# EAGLE board PCB_ACKERMANN_150824 (EAGLE 9.6.2)
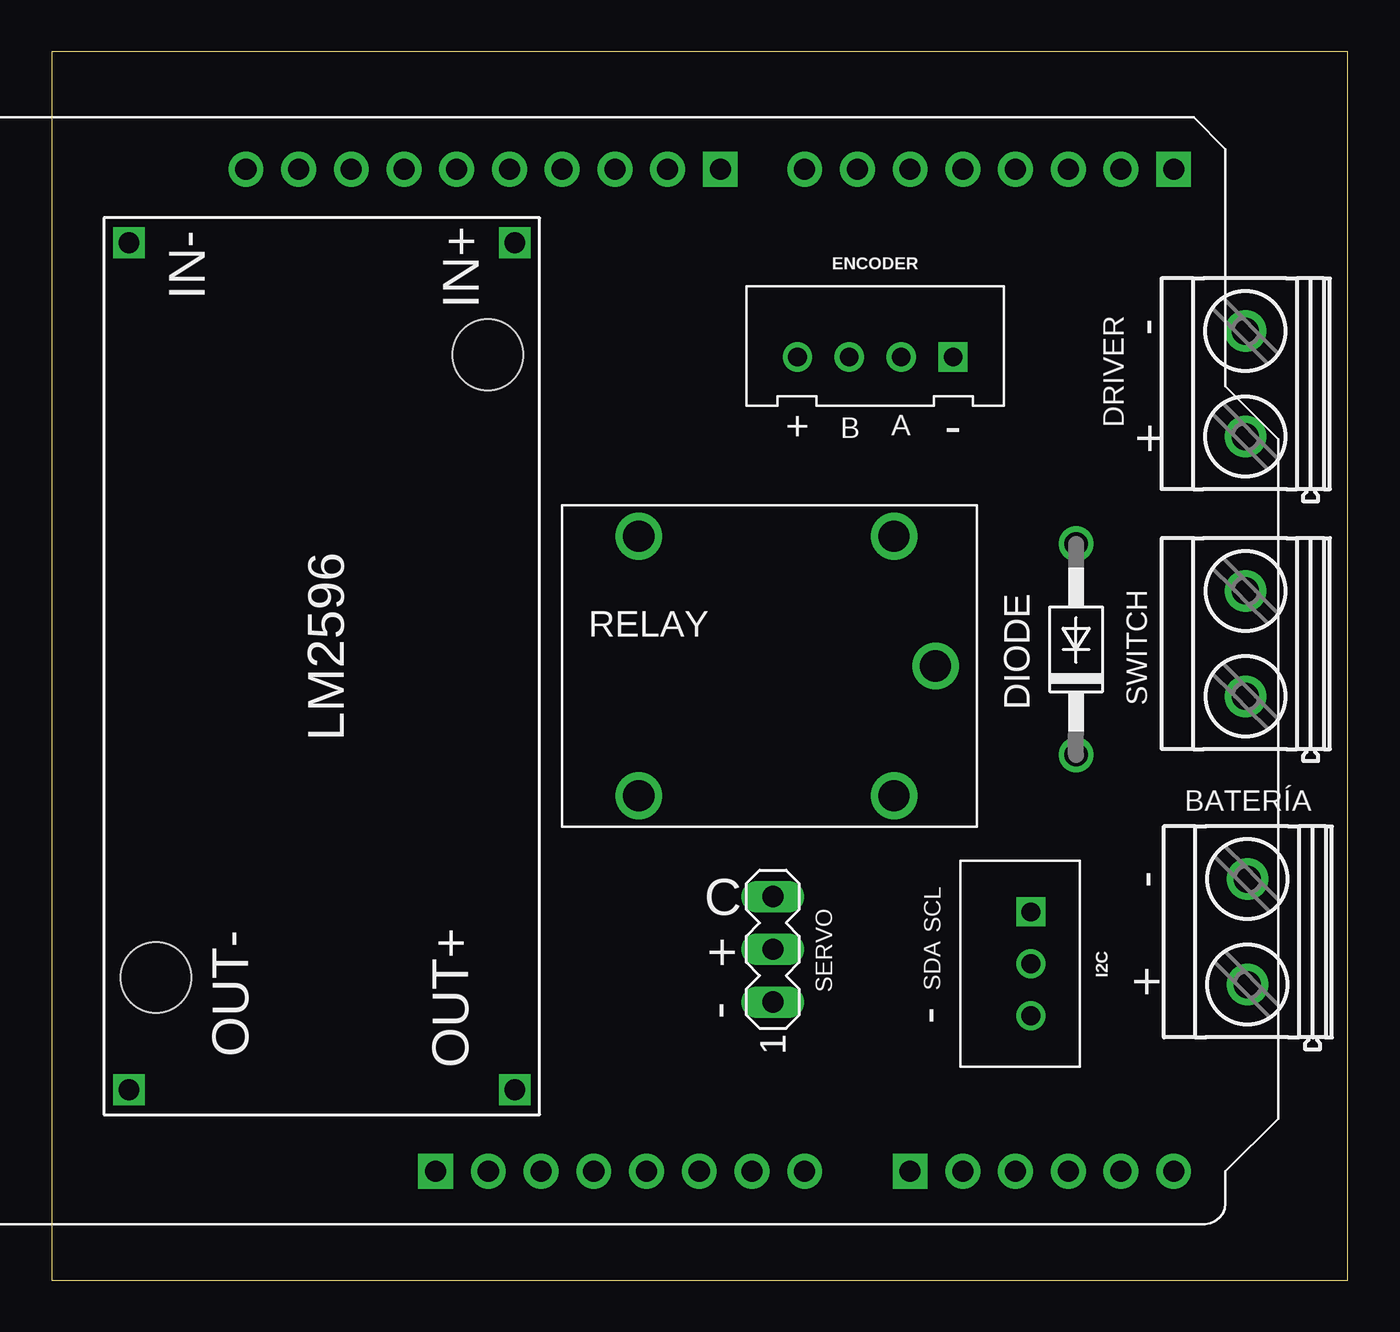
[diagram p0: board, top side]
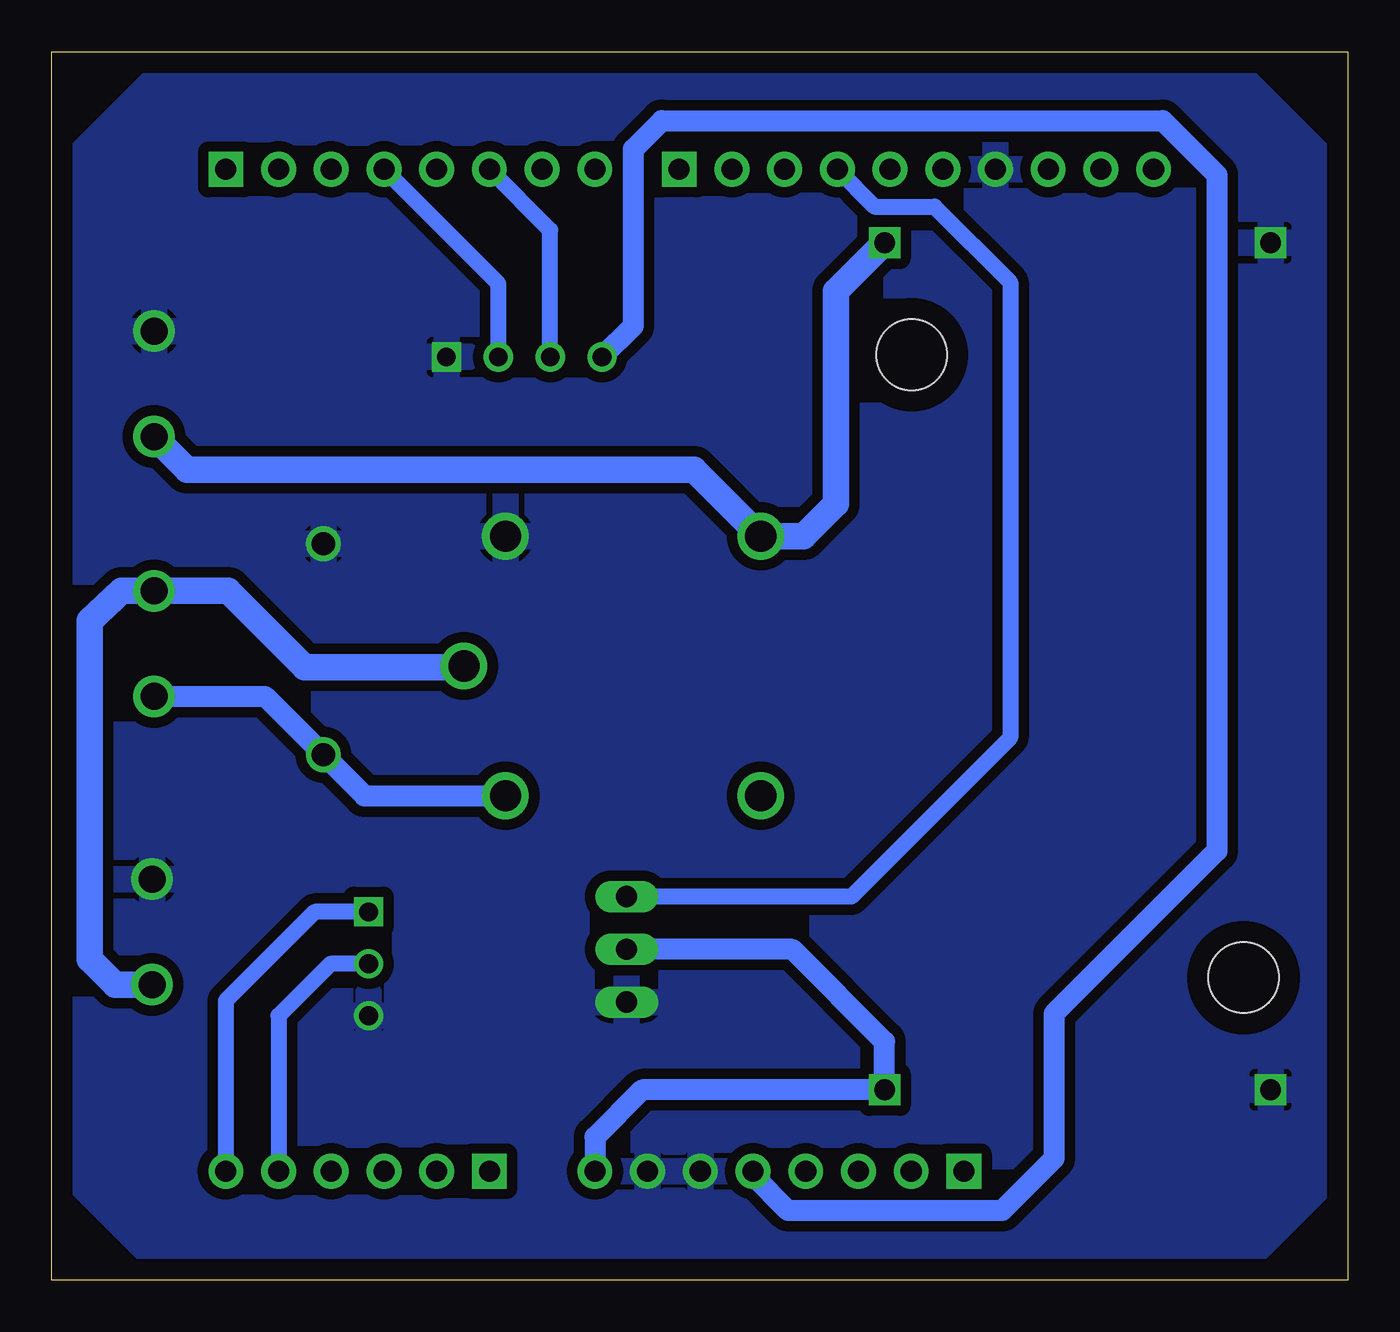
[diagram p1: board, bottom side, seen from below]

Size 62.43 x 59.16 mm. Coordinates in mm from the lower left corner, seen from the top.
Outline: 0,0 62.43,0 62.43,59.16 0,59.16 0,0
Copper layers (1*16): Top 0.035mm / dielectric 1.5mm / Bottom 0.035mm
Design rules "default *": minimum track width 6mil, minimum drill 0.35mm, track to track 20mil, track to pad 20mil, pad to pad 20mil, via to via 20mil, smd to smd 20mil, copper to edge 40mil, drill to drill 6mil, minimum pad ring 10mil, minimum via ring 8mil, stop-mask expansion 4mil, vias tented up to drill 0mil, thermal gap 10mil

## Footprints (pad centres in the part's own frame; a part is rotated, then mirrored left to right if it is on the bottom)
ARDUINO_A000066 = drill 1.016 pad 1.676: 3V3 35.56,2.54; 5V 38.1,2.54; A1 53.34,2.54; A2 55.88,2.54; A3 58.42,2.54; A4 60.96,2.54; A4(SDA) 21.336,50.8; A5 63.5,2.54; A5(SCL) 18.796,50.8; AREF 23.876,50.8; D1 60.96,50.8; D2 58.42,50.8; D3 55.88,50.8; D4 53.34,50.8; D5 50.8,50.8; D6 48.26,50.8; D7 45.72,50.8; D9 39.116,50.8; D10 36.576,50.8; D11 34.036,50.8; D12 31.496,50.8; D13 28.956,50.8; GND_1 43.18,2.54; GND_2 40.64,2.54; GND_3 26.416,50.8; IOREF 30.48,2.54; RST 33.02,2.54; VIN 45.72,2.54 | drill 1.016 pad 1.676 square: A0 50.8,2.54; D0 63.5,50.8; D8 41.656,50.8; P1 27.94,2.54
DO41-10 = drill 1.118: A 5.08,0; C -5.08,0
B4B-XH-A = drill 0.9 square: 1 3.75,0 | drill 0.9: 2 1.25,0; 3 -1.25,0; 4 -3.75,0
B3B-XH-A = drill 0.9 square: 1 2.5,0 | drill 0.9: 2 0,0; 3 -2.5,0
RELAY12V = drill 1.5: 1 16,-14; 2 16,-1.5; C 18,-7.75; NC 3.7,-14; NO 3.7,-1.5
MA03-1 = drill 1.016 long: 1 -2.54,0; 2 0,0; 3 2.54,0
LM2596 = drill 1 square: IN+ 1.2,-1.2; IN- 1.2,-19.8; OUT+ 42,-1.2; OUT- 42,-19.8 | hole 3.4: 6.6,-2.5; 36.6,-18.5
MKDSN1,5/2-5,08 = drill 1.3 pad 2: 1 -2.561,0.025; 2 2.519,0.025

## Placement (x,y rotation side)
A1  A000066  [ARDUINO_A000066]  -9.45,2.7 0 top
DIODE  1N4004  [DO41-10]  49.35,30.38 90 top
ENCODER  JST-XH-4  [B4B-XH-A]  39.67,44.46 0 top
I2C  JST-XH-3  [B3B-XH-A]  47.17,15.24 90 top
RELAY  [RELAY12V]  24.58,37.33 0 top
SV1  [MA03-1]  34.74,15.93 90 top
U$1  LM2596  [LM2596]  23.51,51.17 270 top
X1  MKDSN1,5/2-5,08  [MKDSN1,5/2-5,08]  57.63,16.8 90 top
X2  MKDSN1,5/2-5,08  [MKDSN1,5/2-5,08]  57.53,30.68 90 top
X3  MKDSN1,5/2-5,08  [MKDSN1,5/2-5,08]  57.53,43.19 90 top

## Library data of the parts
A1 = Arduino UNO; AVAILABILITY: Not in stock; MF: Arduino; MP: ARDUINO UNO R3 DIL; PACKAGE: Non-Standard Arduino; PRICE: None
DIODE = diode
ENCODER = con-JST-XH; MF: JST; MPN: B4B-XH-A
I2C = con-JST-XH; MF: JST; MPN: B3B-XH-A
RELAY = ModularRobot
SV1 = con-lstb; OC_FARNELL: unknown; OC_NEWARK: unknown
U$1 = LM2596
X1-X3 = con-phoenix-508

## Nets
3V3: A1.3V3
5V: A1.5V ENCODER.4
CONTROL: A1.D11 SV1.3
FASEA: A1.D3 ENCODER.2
FASEB: A1.D5 ENCODER.3
GND: A1.GND_1 A1.GND_2 A1.GND_3 DIODE.A ENCODER.1 I2C.3 RELAY.2 SV1.1 U$1.IN- U$1.OUT- X1.2 X3.2
SCL: A1.A5 I2C.1
SDA: A1.A4 I2C.2
VIN: RELAY.C X1.1 X2.2
VIN2: RELAY.NO U$1.IN+ X3.1
VINREG: A1.VIN SV1.2 U$1.OUT+
VSWITCH: DIODE.C RELAY.1 X2.1

## Tracks (layer width: path | path; a pad name or v marks a point on that pad's centre or on a via)
5V
  Bottom 1.016: ENCODER.4 34.42,45.97 34.42,54.47 33.04,55.85 8.91,55.85 6.29,53.23 6.29,20.68 14.15,12.82 14.15,5.85 16.66,3.34 26.96,3.34 28.65,5.04 A1.5V
CONTROL
  Bottom 0.762: A1.D11 22.79,51.7 19.9,51.7 16.26,48.06 16.26,26.13 23.91,18.47 SV1.3
FASEA
  Bottom 0.762: ENCODER.2 40.92,47.99 A1.D3
FASEB
  Bottom 0.762: ENCODER.3 38.42,50.57 A1.D5
GND
  pour Bottom: -0.31,52.56 6.19,59.05 56.26,59.05 64.2,51.12 64.2,7.75 55.95,-0.49 6.3,-0.49 -0.38,6.19 -0.38,52.49 -0.29,52.58
SCL
  Bottom 0.762: I2C.1 49.76,17.74 54.05,13.45 A1.A5
SDA
  Bottom 0.762: I2C.2 49.01,15.24 51.51,12.73 A1.A4
VIN
  Bottom 1.27: X1.1 59.38,14.24 60.61,15.46 60.61,31.75 59.07,33.2 X2.2 53.94,33.2 50.25,29.51 42.64,29.51 RELAY.C
VIN2
  Bottom 1.27: X3.1 55.91,39.04 31.49,39.04 RELAY.NO 26.21,35.83 24.64,37.39 24.64,47.63 U$1.IN+
VINREG
  Bottom 1.016: SV1.2 26.76,15.93 22.31,11.48 U$1.OUT+ 33.99,9.17 36.27,6.88 A1.VIN
VSWITCH
  Bottom 1.016: X2.1 52.16,28.12 DIODE.C 47.37,23.33 RELAY.1

## Text on the board
tNames: - | - | DRIVER | + | B | A | + | SWITCH | BATERÍA | SCL | - | C | SDA | + | SERVO | + | - | -